# Altium PCB RING.PcbDoc
Units mm, origin at the board's own origin, x right, y up, seen from the top; angles counter-clockwise.
Board outline 100 x 100 mm, 2 copper layers (Top Layer, Bottom Layer), stack 1.595 mm thick; 2 components, 3 nets, 10 pads, 24 vias.
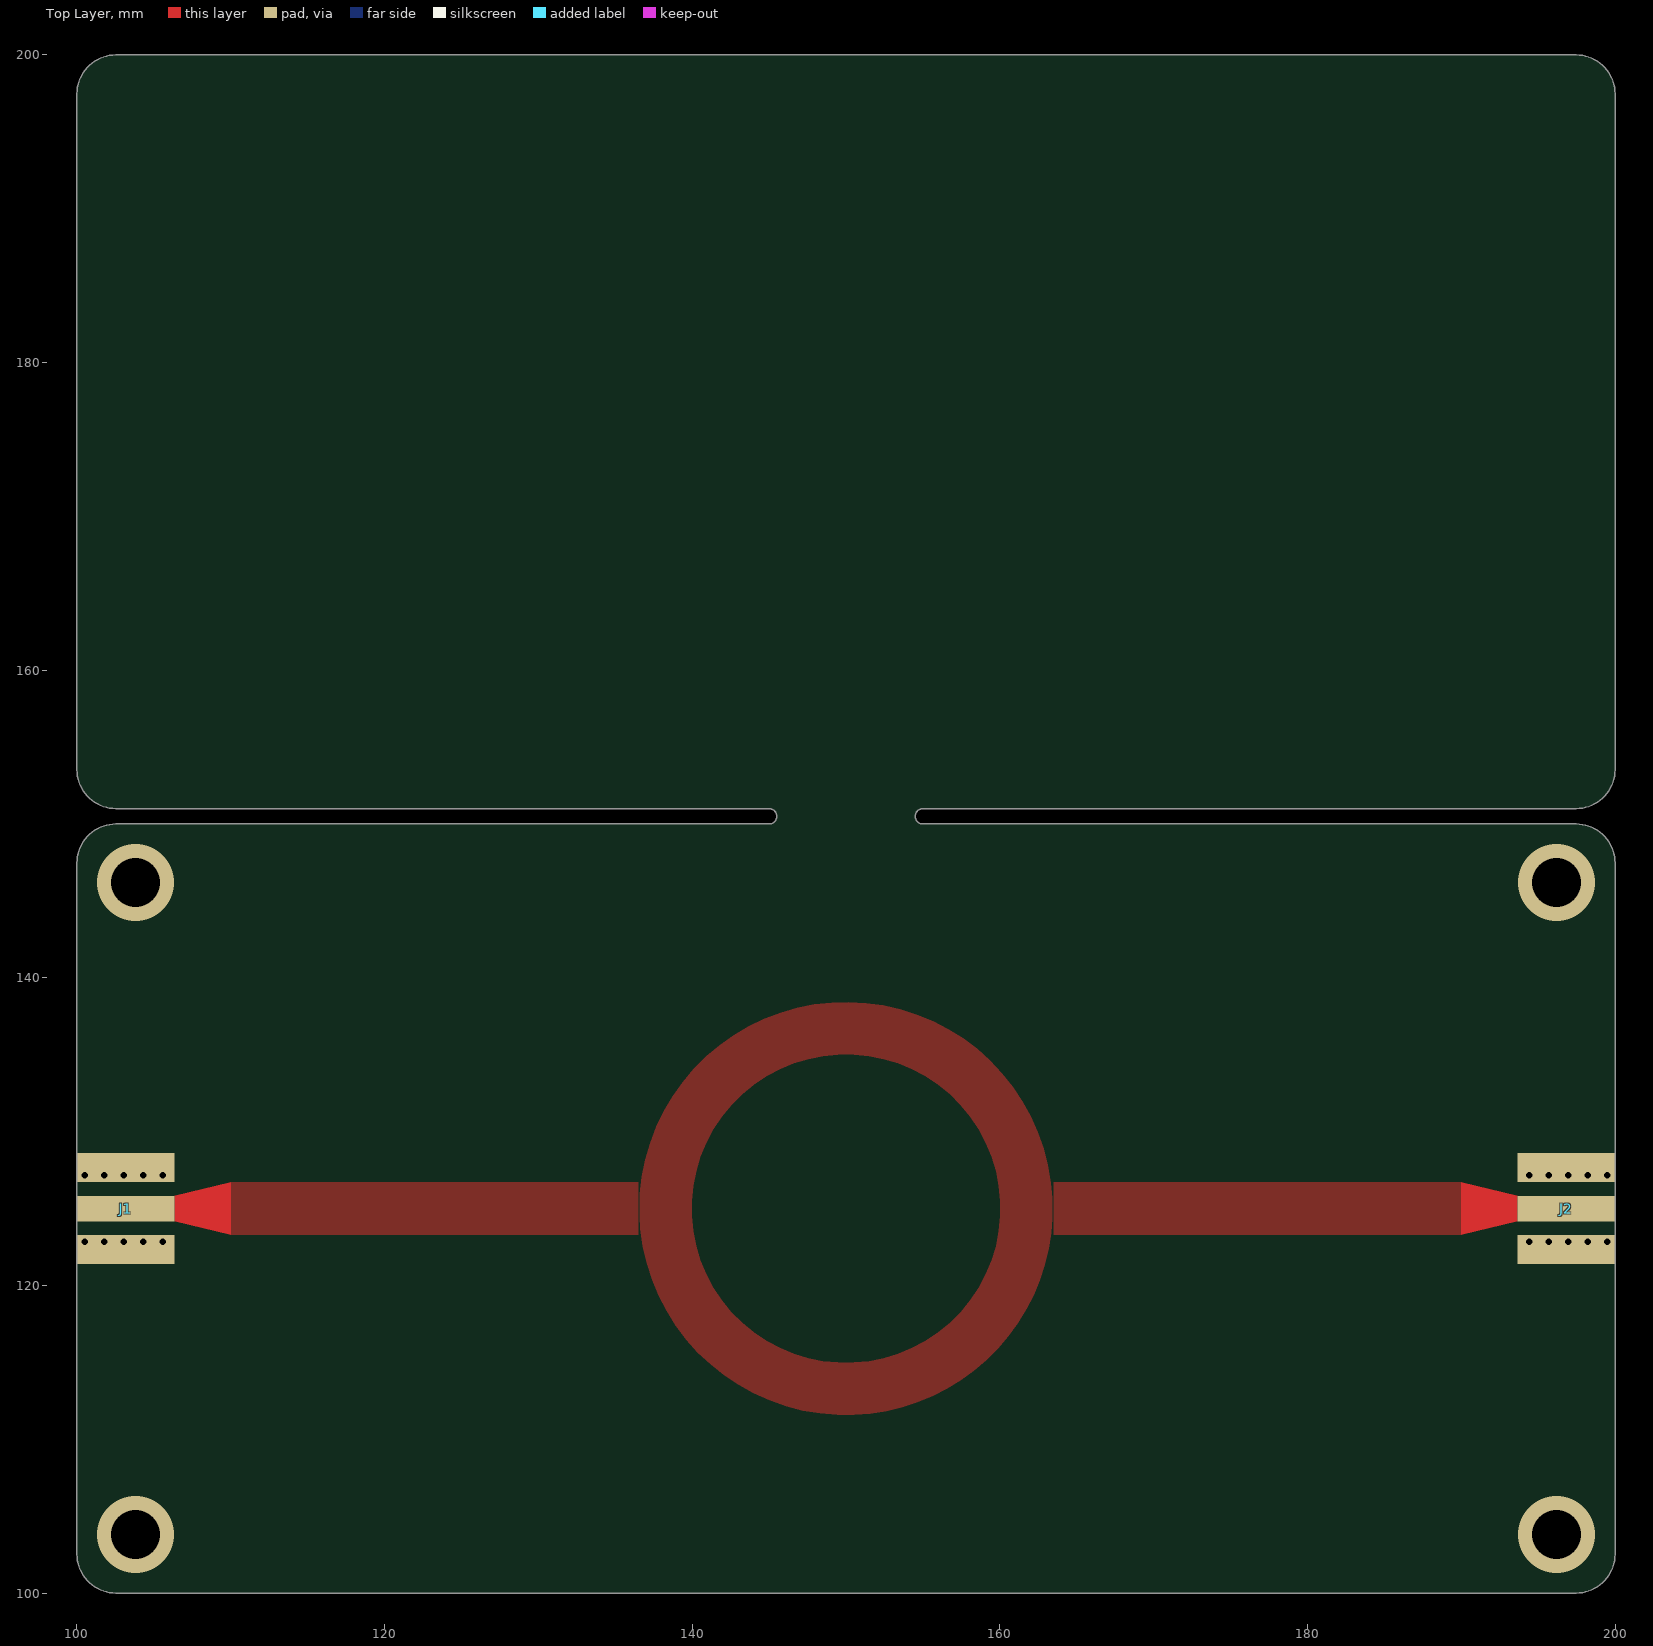
[diagram p0: Top Layer view]
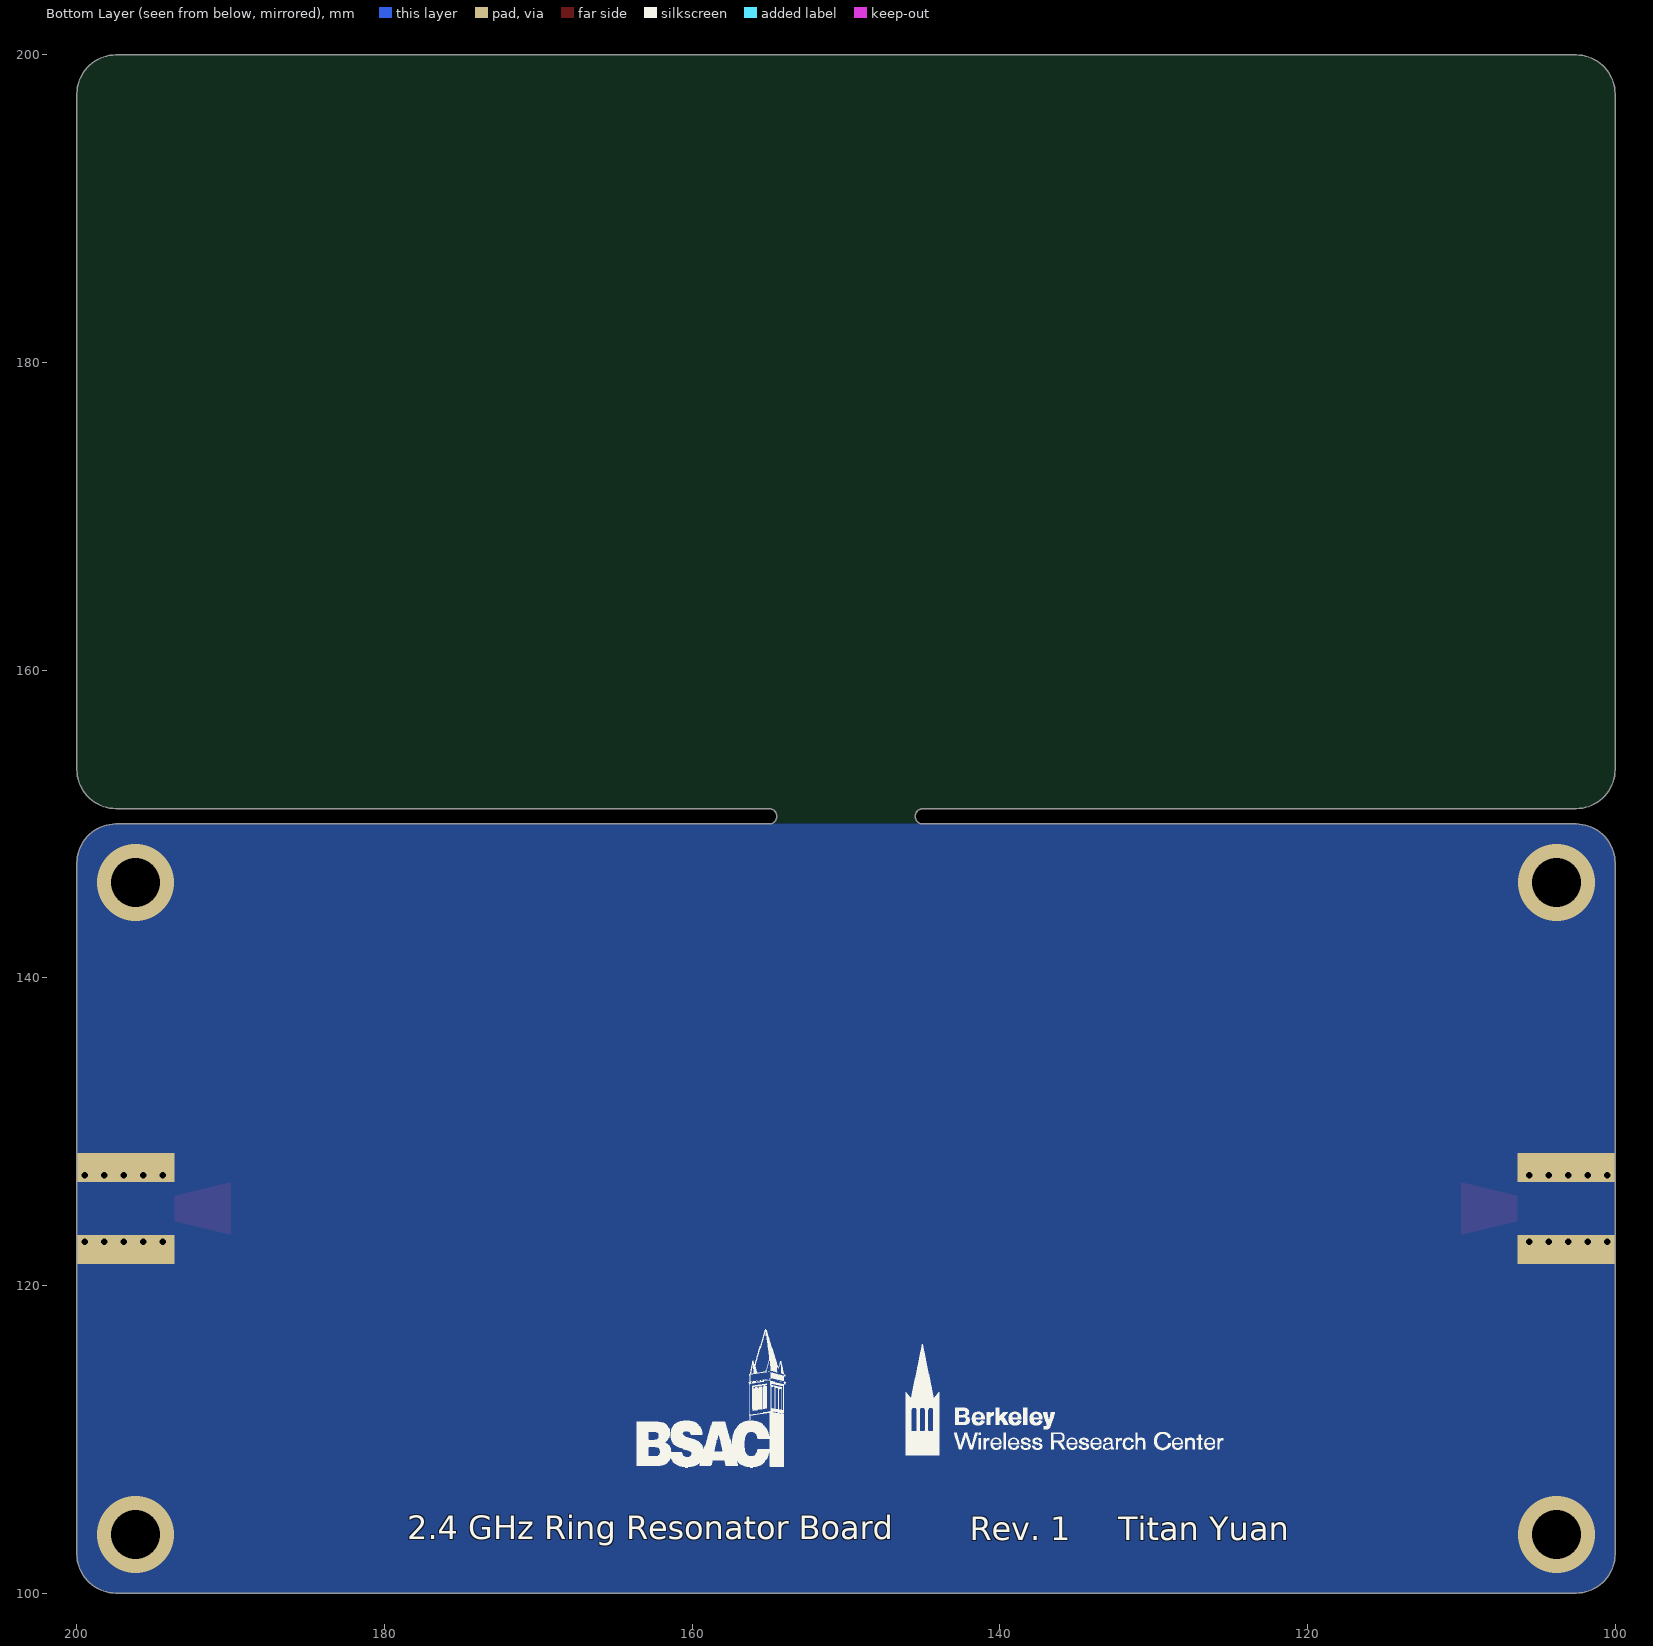
[diagram p1: Bottom Layer view, seen from below]

## Layer stack, top to bottom
Top Solder: solder mask 0.0102, Solder Resist, Dk 3.5
Top Layer: signal copper 0.0356
Dielectric 1: dielectric 1.524, Rogers RO4350B, Dk 3.48
Bottom Layer: signal copper 0.0356
Bottom Solder: solder mask 0.0102, Solder Resist, Dk 3.5

## Board outline
102.54,100 cw(c102.54,102.54) 100,102.54 100,147.46 cw(c102.54,147.46) 102.54,150 145,150 ccw(c145,150.5) 145,151 102.54,151 cw(c102.54,153.54) 100,153.54 100,197.46 cw(c102.54,197.46) 102.54,200 197.46,200 cw(c197.46,197.46) 200,197.46 200,153.54 cw(c197.46,153.54) 197.46,151 155,151 ccw(c155,150.5) 155,150 197.46,150 cw(c197.46,147.46) 200,147.46 200,102.54 cw(c197.46,102.54) 197.46,100

## Design rules (kind name [scope] priority, off if disabled: settings)
Clearance [All] p1: gap=0.1 ignorepadtopadclearanceinfootprint=FALSE
PolygonConnect [All] p1: connectstyle=Direct reliefconductorwidth=0.254 reliefentries=4 polygonreliefangle="90 Angle" airgapwidth=0.254
RoutingVias [All] p1: holewidth=0.711 width=1.27 viastyle="Through Hole" minholewidth=0.711 minwidth=1.27 maxholewidth=0.711 maxwidth=1.27
SolderMaskExpansion [All] p1: expansion=0 istentingtop=FALSE
SupplyNets "Schematic Supply Nets" [InNet('GND')] p1: voltage=0.000
Width [All] p1: maxlimit=0.254 minlimit=0.254 preferedwidth=0.254
30 further rules are at their usual default settings.

## Components (designator, comment, footprint, x,y, rotation, side; value= is the part's Value field where it differs from the comment)
J1 "KH-SMA-KE8-G" KH-SMA-KE8-G 100,125 r180 top
J2 "KH-SMA-KE8-G" KH-SMA-KE8-G 200,125 r0 top

## Footprints (in the part's own frame and the unit in brackets; to place one, negate y for a bottom-side part, rotate by r counter-clockwise, add the part's x,y. Pads: shape width x height; smd on the part's side, far side on the other; paste and mask are expansions set on the pad)
KH-SMA-KE8-G [mil] "Connector RF SMA Edge Launch"
  rect 250x65 smd: 1(-125,0)
  rect 250x75 smd: 2(-125,105) 2(-125,-105)
  rect 250x75 smd far side: 2(-125,105) 2(-125,-105)

## Part data
J1 J2: library part CONN_RF_SMA, "Connector RF SMA Generic", LCSC=C530661, Manufacturer="Shenzhen Kinghelm Electron Co", Manufacturer Part Number=KH-SMA-KE8-G

## Via types
v1: diameter 0.406, hole 0.406, Top Layer to Bottom Layer, 20 vias
v2: diameter 5, hole 3.2, Top Layer to Bottom Layer, 4 vias

## Nets (pads, with @x,y where several pads share a name; then routed paths per layer and width w, separated by ;. In a path a pad name is that pad's centre, name@x,y a point inside that pad or via, vN(x,y) a via of type N, cw(c..) or ccw(c..) an arc to the next point about the centre after c; other vN are vias at no path point)
GND: J1.2 J2.2
  other v1: 100.508,122.841 101.778,122.841 103.048,122.841 104.318,122.841 105.588,122.841 194.412,122.841 195.682,122.841 196.952,122.841 198.222,122.841 199.492,122.841 100.508,127.159 101.778,127.159 103.048,127.159 104.318,127.159 105.588,127.159 194.412,127.159 195.682,127.159 196.952,127.159 198.222,127.159 199.492,127.159
  other v2: 103.81,103.81 196.19,103.81 103.81,146.19 196.19,146.19
RING_1: J1.1
RING_2: J2.1

## Polygon pours and split planes (outlines as drawn)
no net on Top Solder "GND_L02_P002" (solid, pour order 2): 102.54,100 cw(c102.54,102.54) 100,102.54 100,147.46 cw(c102.54,147.46) 102.54,150 145,150 155,150 197.46,150 cw(c197.46,147.46) 200,147.46 200,102.54 cw(c197.46,102.54) 197.46,100
no net on Top Solder "NONET_L-01_P-001" (solid): 145,150 ccw(c145,150.5) 145,151 155,151 ccw(c155,150.5) 155,150
no net on Top Solder "NONET_L01_P000" (solid): 102.54,151 cw(c102.54,153.54) 100,153.54 100,197.46 cw(c102.54,197.46) 102.54,200 197.46,200 cw(c197.46,197.46) 200,197.46 200,153.54 cw(c197.46,153.54) 197.46,151 145,151
no net on Bottom Solder "NONET_L-01_P-001" (solid): 145,150 ccw(c145,150.5) 145,151 155,151 ccw(c155,150.5) 155,150
no net on Bottom Solder "NONET_L01_P000" (solid): 102.54,151 cw(c102.54,153.54) 100,153.54 100,197.46 cw(c102.54,197.46) 102.54,200 197.46,200 cw(c197.46,197.46) 200,197.46 200,153.54 cw(c197.46,153.54) 197.46,151 145,151
GND on Bottom Layer "GND_L02_P007" (solid, pour order 7): 102.54,100 cw(c102.54,102.54) 100,102.54 100,147.46 cw(c102.54,147.46) 102.54,150 145,150 155,150 197.46,150 cw(c197.46,147.46) 200,147.46 200,102.54 cw(c197.46,102.54) 197.46,100
RING_1 on Top Layer "RING_1_L01_P008" (solid, pour order 8): 110,123.296 110,126.704 136.485,126.704 136.485,123.296
RING_2 on Top Layer "RING_2_L01_P008" (solid, pour order 8): 163.516,123.296 190,123.296 190,126.704 163.516,126.704
no net on Top Layer "NONET_L01_P010" (solid, pour order 10): 150,111.585 cw(c150,125) 163.416,125 cw(c150,125)

## Other copper
Top Layer:
  pour cut-out: 150,114.993 cw(c150,125) 160.008,125 cw(c150,125)
  region net RING_2: 193.65,125.825 193.65,124.174 190,123.296 190,126.704
  region net RING_1: 106.35,125.825 106.35,124.174 110,123.296 110,126.704

## Silkscreen, mask and mechanical layers (free items; w line width, h text height)
Bottom Overlay:
  drawing of 41 lines, arcs and shapes, not listed
  text "2.4 GHz Ring Resonator Board" at 178.523,103.49 h1.52
  text "Titan Yuan" at 132.295,103.429 h1.52
  text "Rev. 1" at 141.947,103.429 h1.52
Mechanical 1:
  lines w0.254: 145,150 ccw(c145,150.5) 145,151 ; 145,150 155,150 ; 145,150 102.54,150 ccw(c102.54,147.46) 100,147.46 100,102.54 ccw(c102.54,102.54) 102.54,100 197.46,100 ccw(c197.46,102.54) 200,102.54 200,147.46 ccw(c197.46,147.46) 197.46,150 155,150 ; 145,151 155,151 ; 145,151 102.54,151 cw(c102.54,153.54) 100,153.54 100,197.46 cw(c102.54,197.46) 102.54,200 197.46,200 cw(c197.46,197.46) 200,197.46 200,153.54 cw(c197.46,153.54) 197.46,151 155,151 ; 155,150 cw(c155,150.5) 155,151